# Altium PCB Main.PcbDoc
Units mm, origin at the board's own origin, x right, y up, seen from the top; angles counter-clockwise.
Board outline 60 x 30 mm, 2 copper layers (Top Layer, Bottom Layer); 37 components, 56 nets, 159 pads, 18 vias.
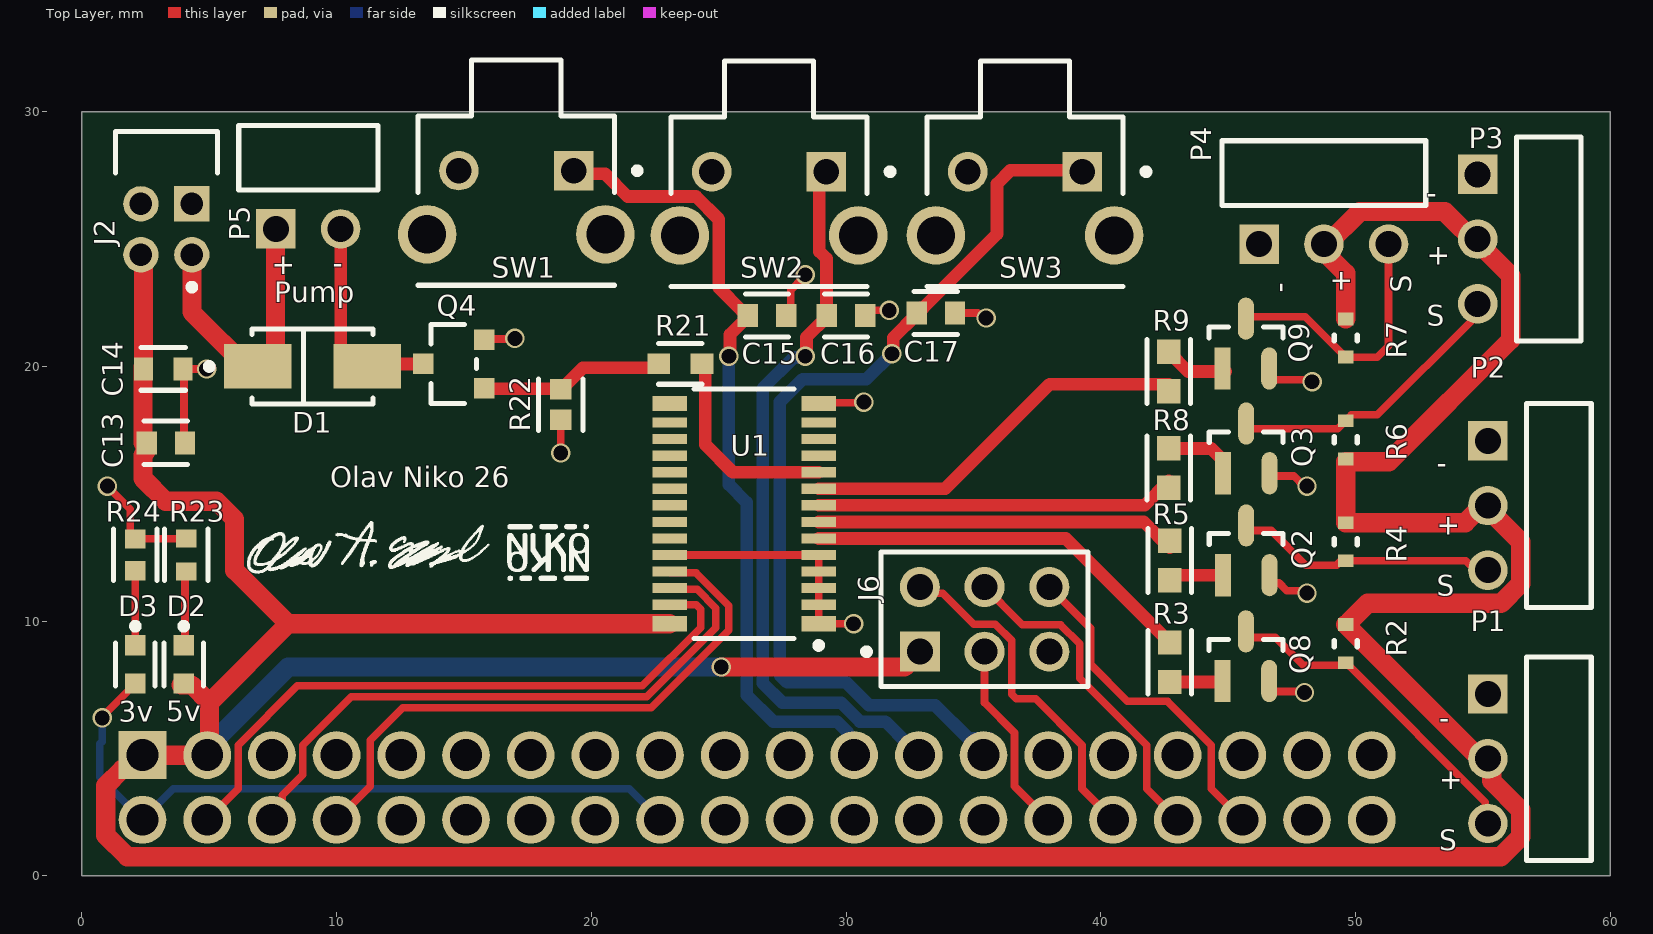
[diagram p0: Top Layer view]
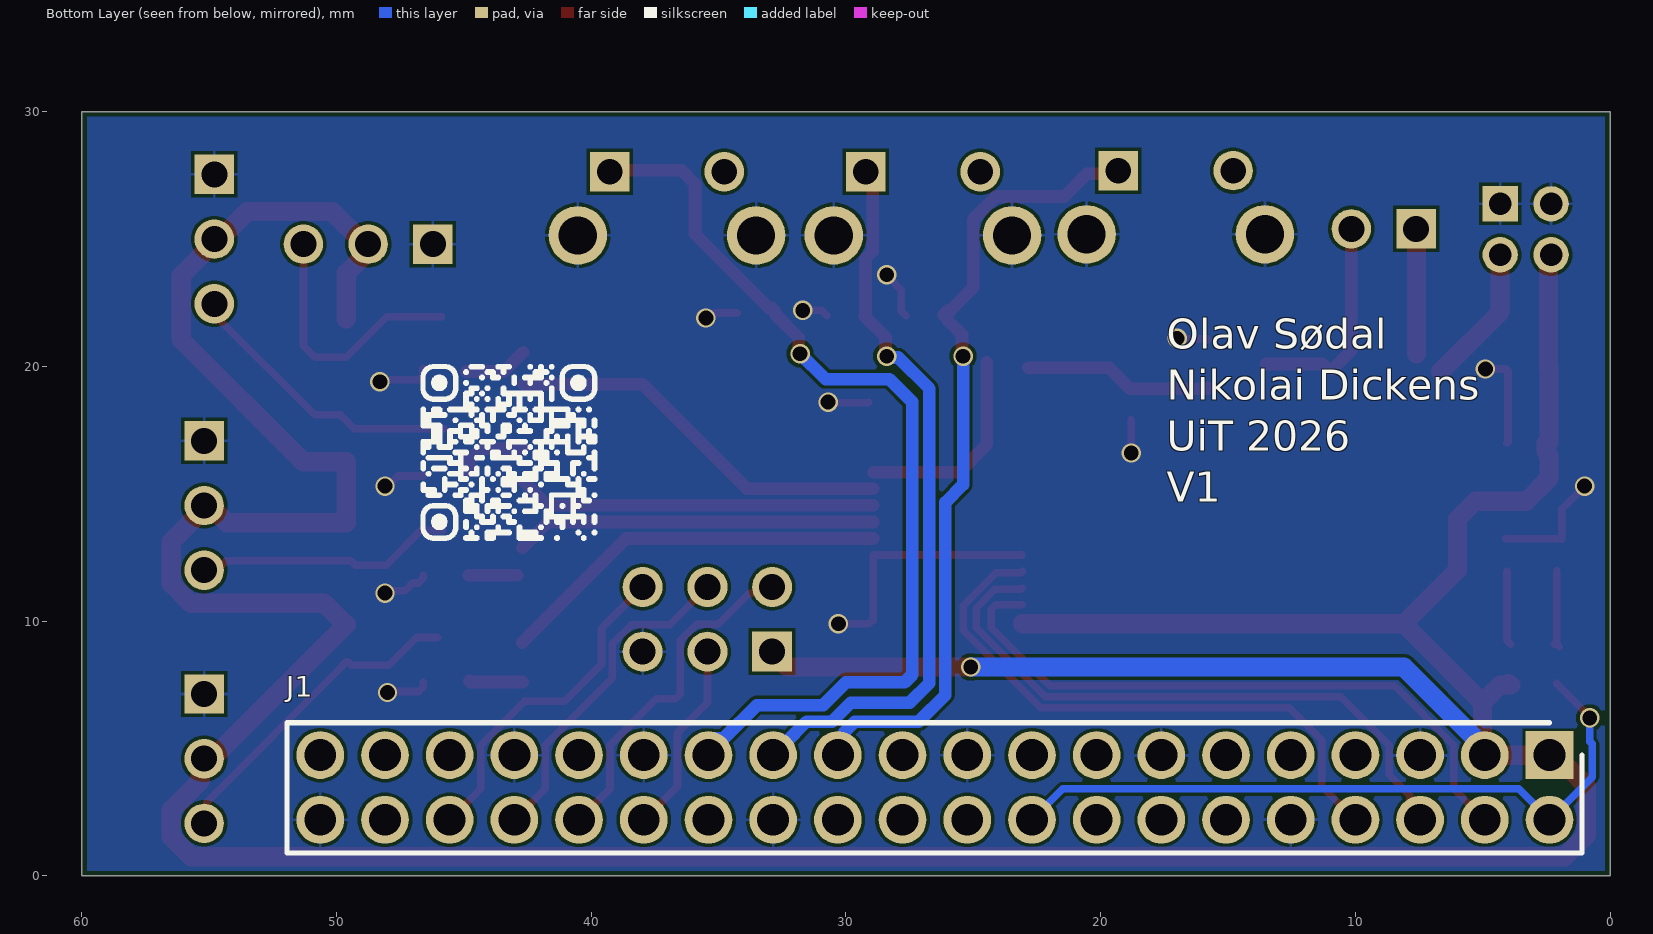
[diagram p1: Bottom Layer view, seen from below]
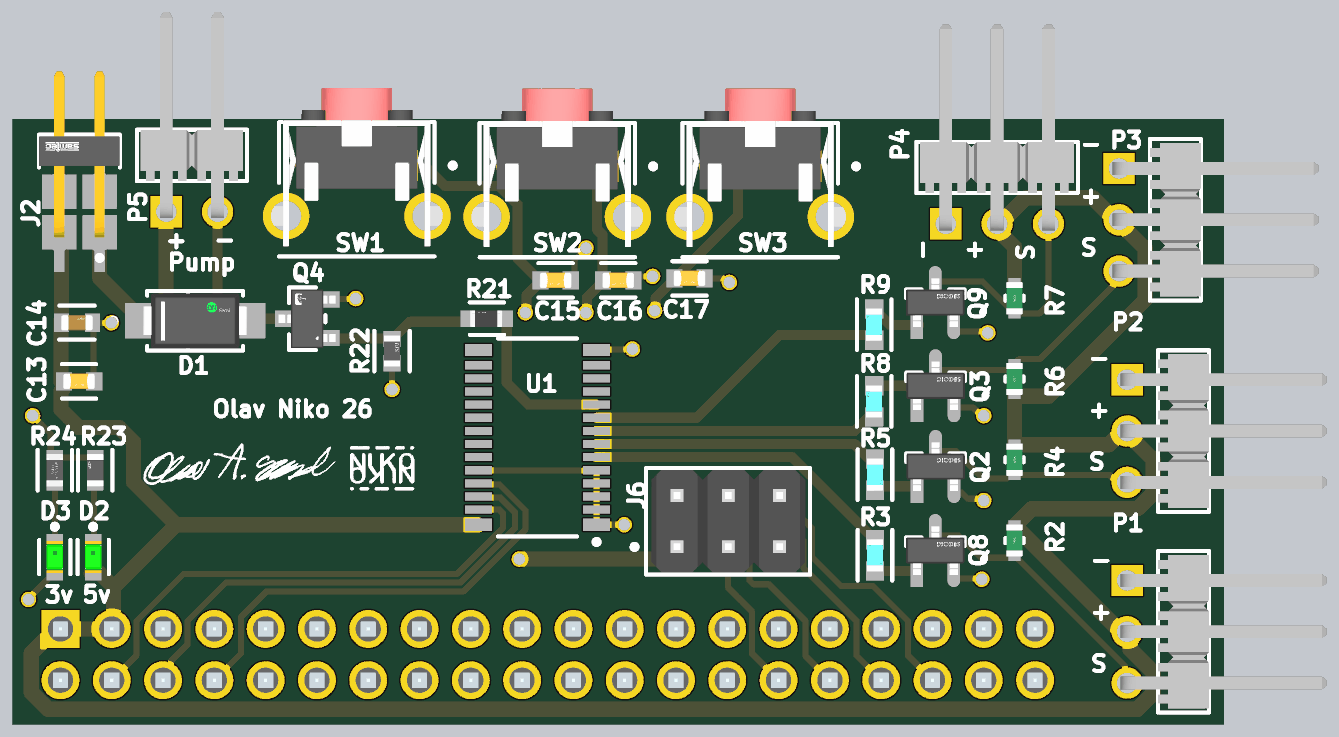
[diagram p2: 3D render of the assembled board from above, using the file's embedded part models]

## Layer stack, top to bottom
Top Solder: solder mask 0.0102, Solder Resist, Dk 3.5
Top Layer: signal copper 0.0356
Dielectric 1: dielectric 0.32, FR-4, Dk 4.8
Bottom Layer: signal copper 0.0356
Bottom Solder: solder mask 0.0102, Solder Resist, Dk 3.5

## Board outline
60,0 0,0 0,30 60,30

## Design rules (kind name [scope] priority, off if disabled: settings)
BoardOutlineClearance [All] p1: gap=0.2 ignorepadtopadclearanceinfootprint=FALSE
Clearance [All] p1: gap=0.127 ignorepadtopadclearanceinfootprint=FALSE except(0.25: Arc-Hole Track-Hole SMDPad-Hole THPad-Hole Via-Hole Fill-Hole Poly-Hole Region-Hole Text-Hole)
ComponentClearance [All] p1: gap=0.127 collisioncheckmode=3 verticalgap=0.127 showdistances=TRUE
DiffPairsRouting [All] p1: maxlimit=0.254 minlimit=0.127 mostfreqgap=0.127 toplayer_minwidth=0.127 toplayer_maxwidth=25.4 toplayer_prefwidth=0.127 bottomlayer_minwidth=0.127 bottomlayer_maxwidth=25.4 bottomlayer_prefwidth=0.127 maxuncoupledlength=12.7
Height [All] p1: minheight=0 maxheight=1816.048 prefheight=12.7
HoleSize [All] p1: absolutevalues=TRUE maxlimit=6.3 minlimit=0.3 maxpercent=80.000 minpercent=20.000
HoleToHoleClearance [All] p1: gap=0.25 allowstackedmicrovias=FALSE
MinimumAnnularRing [All] p1: minimumring=0.076
MinimumSolderMaskSliver [All] p1: minsoldermaskwidth=0
PlaneClearance [All] p1: clearance=0.127
PlaneConnect PlaneConnectPowerPads [InPadClass('PowerPads')] p1: planeconnectstyle=Direct reliefexpansion=0.508 reliefentries=4 reliefconductorwidth=0.254 reliefairgap=0.254
PlaneConnect [All] p2: pad.planeconnectstyle=Relief pad.reliefexpansion=0.3 pad.reliefentries=4 pad.reliefconductorwidth=0.127 pad.reliefairgap=0.127 via.planeconnectstyle=Direct via.reliefexpansion=0.3 via.reliefentries=4 via.reliefconductorwidth=0.127 via.reliefairgap=0.127
PolygonConnect PolygonConnectPowerPads [All vs (InPadClass('PowerPads'))] p1: connectstyle=Direct reliefconductorwidth=0.254 reliefentries=4 polygonreliefangle="90 Angle" airgapwidth=0.254
PolygonConnect [All] p2: thpad.connectstyle=Relief thpad.reliefconductorwidth=0.127 thpad.reliefentries=4 thpad.polygonreliefangle="90 Angle" thpad.airgapwidth=0.127 smdpad.connectstyle=Relief smdpad.reliefconductorwidth=0.127 smdpad.reliefentries=4 smdpad.polygonreliefangle="90 Angle" smdpad.airgapwidth=0.127 via.connectstyle=Direct via.reliefconductorwidth=0.127 via.reliefentries=4 via.polygonreliefangle="90 Angle" via.airgapwidth=0.127
RoutingVias [All] p1: holewidth=0.3 width=0.6 viastyle="Through Hole" minholewidth=0.3 minwidth=0.6 maxholewidth=0.6 maxwidth=6.6
SilkToSilkClearance [All] p1: silktosilkclearance=0
SilkToSolderMaskClearance [IsPad] p1: minsilkscreentomaskgap=0.127 clearancetoexposedcopper=TRUE
SolderMaskExpansion [All] p1: expansion=0.075 istentingtop=FALSE
SupplyNets "Schematic Supply Nets_4" [InNet('12V')] p1: voltage=0.000
SupplyNets "Schematic Supply Nets" [InNet('GND')] p2: voltage=0.000
SupplyNets "Schematic Supply Nets_1" [InNet('5V')] p3: voltage=0.000
SupplyNets "Schematic Supply Nets_3" [InNet('3V3')] p4: voltage=0.000
Width [All] p1: maxlimit=25.4 minlimit=0.127 preferedwidth=0.127 minimp=50.000000 maximp=50.000000 favimp=50.000000
20 further rules are at their usual default settings.

## Classes and differential pairs
component class Main: J2 J6
component class Designator: C13 C14 C15 C16 C17 D1 D2 D3 J1 P1 P2 P3 P4 P5 Q2 Q3 Q4 Q8 Q9 R2 R3 R4 R5 R6 R7 R8 R9 R21 R22 R23 R24 SW1 SW3 U1

## Components (designator, comment, footprint, x,y, rotation, side; value= is the part's Value field where it differs from the comment)
C13 "GRM188R61A106KE69D" FP-GRM18-0_15-MFG 3.2,19.9 r0 top value=10uF
C14 "100 nF" FP-CC0603-DA-MFG 3.3,17 r0 top
C15 "100 nF" FP-CC0603-DA-MFG 26.9,22 r0 top
C16 "100 nF" FP-CC0603-DA-MFG 30,22 r0 top
C17 "100 nF" FP-CC0603-DA-MFG 33.528,22.098 r0 top
D1 "SS14" FP-403AE-MFG 9.05,20 r180 top
D2 "LTST-C193KGKT-5A" FP-LTST-C193KGKT-5A-MFG 4,8.3 r270 top
D3 "LTST-C193KGKT-5A" FP-LTST-C193KGKT-5A-MFG 2.1,8.3 r270 top
J1 "803-87-040-10-001101" RHDR40W76P254_2X20_5080X508X700P 2.38,4.74 r0 bottom
J2 "TMM-102-01-G-D-RA" FP-TMM-102-01-G-D-RA-MFG 3.318,28.404 r180 top
J6 "M20-9980346" FP-M20-9980346-MFG 35.44,10.07 r0 top
P1 "MTSW-103-08-L-S-229-RA" SMTC-MTSW-103-08-X-S-229-RA 55.2,7.14 r270 top
P2 "MTSW-103-08-L-S-229-RA" SMTC-MTSW-103-08-X-S-229-RA 55.2,17.08 r270 top
P3 "MTSW-103-08-L-S-229-RA" SMTC-MTSW-103-08-X-S-229-RA 54.8,27.54 r270 top
P4 "MTSW-103-08-L-S-229-RA" SMTC-MTSW-103-08-X-S-229-RA 46.22,24.8 r0 top
P5 "TSW-102-22-G-S-RA" SMTC-TSW-102-22-X-S-RA 7.62,25.4 r0 top
Q2 "MMBT3904-7-F" FP-SOT23-IPC_A 45.712,12.783 r90 top
Q3 "MMBT3904-7-F" FP-SOT23-IPC_A 45.712,16.783 r90 top
Q4 "AO3400A" FP-SOT23-MFG 14.6,20.1 r180 top
Q8 "MMBT3904-7-F" FP-SOT23-IPC_A 45.7,8.623 r90 top
Q9 "MMBT3904-7-F" FP-SOT23-IPC_A 45.7,20.9 r90 top
R2 "SG73P1JTTD1002F" FP-SG73P1J-MFG 49.62,9.117 r90 top
R3 "RK73G1JTTD1001F" FP-RK73G1J-IPC_B 42.712,8.387 r270 top
R4 "SG73P1JTTD1002F" FP-SG73P1J-MFG 49.62,13.117 r90 top
R5 "RK73G1JTTD1001F" FP-RK73G1J-IPC_B 42.712,12.38 r270 top
R6 "SG73P1JTTD1002F" FP-SG73P1J-MFG 49.62,17.117 r270 top
R7 "SG73P1JTTD1002F" FP-SG73P1J-MFG 49.62,21.117 r90 top
R8 "RK73G1JTTD1001F" FP-RK73G1J-IPC_B 42.672,16.006 r90 top
R9 "RK73G1JTTD1001F" FP-RK73G1J-IPC_B 42.672,19.808 r90 top
R21 "RT0603FRE07100RL" FP-RT0603-MFG 23.5,20.1 r180 top value=100Ω
R22 "RMCF0603FG100K" FP-RMCF0603-IPC_C 18.8,18.5 r90 top
R23 "RC1608J222CS" FP-RC1608-IPC_C 4.1,12.6 r90 top
R24 "CRGCQ0603J3K3" FP-CRGCQ0603-IPC_C 2.1,12.6 r90 top value=3.3KΩ
SW1 "B3F-3122" FP-B3F-3122-MFG 17.054,27.611 r180 top
SW2 "B3F-3122" FP-B3F-3122-MFG 26.98,27.571 r180 top
SW3 "B3F-3122" FP-B3F-3122-MFG 37.028,27.571 r180 top
U1 "PCA9685PW/Q900,118" SOT361-1_V 26,14.222 r180 top

## Footprints (in the part's own frame and the unit in brackets; to place one, negate y for a bottom-side part, rotate by r counter-clockwise, add the part's x,y. Pads: shape width x height; smd on the part's side, far side on the other; paste and mask are expansions set on the pad)
FP-403AE-MFG [mm]
  rect 2.65x1.75 smd paste+0 mask+0: 1(-2.15,0) 2(2.15,0)
  silkscreen extent -2.37,-1.48 4.17,1.48, body extent -3.57,-1.58 3.57,1.58, height 0.25
FP-B3F-3122-MFG [mm]
  rect 1.55x1.55 hole 1 paste-2539.97 mask+0: 1(-2.25,-0.075)
  round 1.55 hole 1 paste-2539.97 mask+0: 2(2.25,-0.075)
  round 2.3 hole 1.5 paste-2539.97 mask+0: 3(-3.5,2.425) 4(3.5,2.425)
  silkscreen extent -4.88,-4.43 3.85,4.43, body extent -4.75,-4.52 4.75,4.52, height 0.25
FP-CC0603-DA-MFG [mm]
  rect 0.8x0.9 smd paste+0 mask+0: 1(-0.75,0) 2(0.75,0)
  silkscreen extent -0.85,-0.85 0.85,0.85, body extent -1.35,-0.75 1.35,0.75, height 0.25
FP-CRGCQ0603-IPC_C [mm]
  rect 0.758x0.812 smd paste+0 mask+0: 1(-0.627,0) 2(0.627,0)
  silkscreen extent -1.01,-0.85 1.01,0.85, body extent -1.11,-0.55 1.11,0.55, height 0.25
FP-GRM18-0_15-MFG [mm]
  rect 0.75x0.9 smd paste+0 mask+0: 1(-0.775,0) 2(0.775,0)
  silkscreen extent -0.88,-0.83 0.87,0.85, body extent -1.25,-0.58 1.25,0.58, height 0.25
FP-LTST-C193KGKT-5A-MFG [mm]
  rect 0.8x0.8 smd paste+0 mask+0: 1(-0.75,0) 2(0.75,0)
  silkscreen extent -1.62,-0.77 0.85,0.77, body extent -1.25,-0.55 1.25,0.55, height 0.25
FP-M20-9980346-MFG [mm]
  rect 1.57x1.57 hole 1.02 paste-2539.97 mask+0: 1(-2.54,-1.27)
  round 1.57 hole 1.02 paste-2539.97 mask+0: 2(-2.54,1.27) 3(0,-1.27) 4(0,1.27) 5(2.54,-1.27) 6(2.54,1.27)
  silkscreen extent -4.76,-2.64 4.06,2.64, body extent -3.8,-2.53 3.82,2.55, height 8.64
FP-RC1608-IPC_C [mm]
  rect 0.71x0.812 smd paste+0 mask+0: 1(-0.651,0) 2(0.651,0)
  silkscreen extent -1.01,-0.85 1.01,0.85, body extent -1.11,-0.55 1.11,0.55, height 0.25
FP-RK73G1J-IPC_B [mm]
  rect 0.956x0.912 smd paste+0 mask+0: 1(-0.775,0) 2(0.775,0)
  silkscreen extent -1.25,-0.86 1.25,0.86, body extent -1.5,-0.71 1.5,0.71, height 0.25
FP-RMCF0603-IPC_C [mm]
  rect 0.806x0.858 smd paste+0 mask+0: 1(-0.601,0) 2(0.601,0)
  silkscreen extent -1,-0.87 1,0.87, body extent -1.1,-0.58 1.1,0.58, height 0.25
FP-RT0603-MFG [mm]
  rect 0.9x0.8 smd paste+0 mask+0: 1(-0.85,0) 2(0.85,0)
  silkscreen extent -0.85,-0.81 0.86,0.8, body extent -1.4,-0.55 1.4,0.55, height 0.25
FP-SG73P1J-MFG [mm]
  rect 0.5x0.6 smd paste+0 mask+0: 1(-0.75,0) 2(0.75,0)
  silkscreen extent -0.13,-0.45 0.13,0.45, body extent -1.1,-0.55 1.1,0.55, height 0.25
FP-SOT23-IPC_A [mm]
  rect 1.659x0.627 smd paste+0 mask+0: 1(-0.977,0.915)
  rrect100% 1.659x0.627 smd paste+0 mask+0: 2(-0.977,-0.915) 3(0.977,0)
  silkscreen extent 0.23,-1.45 0.65,1.45, body extent -2.31,-1.95 2.31,1.95, height 0.25
FP-SOT23-MFG [mm]
  rect 0.8x0.8 smd paste+0 mask+0: 1(-1.2,0.95) 2(-1.2,-0.95) 3(1.2,0)
  silkscreen extent -0.9,-1.55 0.9,1.55, body extent -1.7,-1.78 1.7,1.78, height 0.25
FP-TMM-102-01-G-D-RA-MFG [mm]
  rect 1.39x1.39 hole 0.89 paste-2539.97 mask+0: 1(-1,2.02)
  round 1.39 hole 0.89 paste-2539.97 mask+0: 2(-1,4.02) 3(1,2.02) 4(1,4.02)
  silkscreen extent -2,-0.81 2,5.41, body extent -2.1,-4.24 2.1,6.09, height 0.25
RHDR40W76P254_2X20_5080X508X700P [mm]
  rect 1.875x1.875 hole 1.25: 1(0,0)
  round 1.875 hole 1.25: 2(0,2.54) 3(2.54,0) 4(2.54,2.54) 5(5.08,0) 6(5.08,2.54) 7(7.62,0) 8(7.62,2.54) 9(10.16,0) 10(10.16,2.54) 11(12.7,0) 12(12.7,2.54) 13(15.24,0) 14(15.24,2.54) 15(17.78,0) 16(17.78,2.54) 17(20.32,0) 18(20.32,2.54) 19(22.86,0) 20(22.86,2.54) 21(25.4,0) 22(25.4,2.54) 23(27.94,0) 24(27.94,2.54) 25(30.48,0) 26(30.48,2.54) 27(33.02,0) 28(33.02,2.54) 29(35.56,0) 30(35.56,2.54) 31(38.1,0) 32(38.1,2.54) 33(40.64,0) 34(40.64,2.54) 35(43.18,0) 36(43.18,2.54) 37(45.72,0) 38(45.72,2.54) 39(48.26,0) 40(48.26,2.54)
  silkscreen extent -1.27,-1.27 49.57,3.85, body extent -1.27,-1.27 49.53,3.81, height 7
SMTC-MTSW-103-08-X-S-229-RA [mm] "Assembly .025\" [.64] SQ Post Terminal Strip, 1x3 Pins, Right Angle, 2.54mm Pitch, Male"
  rect 1.55x1.55 hole 1.02: 1(0,0)
  round 1.55 hole 1.02: 2(2.54,0) 3(5.08,0)
  silkscreen extent -1.46,1.52 6.54,4.06, body extent -1.27,-0.32 6.35,9.88, height 3.05
SMTC-TSW-102-22-X-S-RA [mm] ".025 SQ Post Terminal Strip Assembly, 1x2 Pins, Right Angle, 2.54mm Pitch, Male"
  rect 1.55x1.55 hole 1.02: 1(0,0)
  round 1.55 hole 1.02: 2(2.54,0)
  silkscreen extent -1.46,1.52 4,4.06, body extent -1.27,-0.32 3.81,9.9, height 3.05
SOT361-1_V [mm] "SOP, 28-Leads, Body 9.7x4.4mm, Pitch 0.65mm, NXP Recommended"
  rect 1.35x0.6 smd: 1(-2.925,4.325) 14(-2.925,-4.325) 15(2.925,-4.325) 28(2.925,4.325)
  rect 1.35x0.4 smd: 2(-2.925,3.575) 3(-2.925,2.925) 4(-2.925,2.275) 5(-2.925,1.625) 6(-2.925,0.975) 7(-2.925,0.325) 8(-2.925,-0.325) 9(-2.925,-0.975) 10(-2.925,-1.625) 11(-2.925,-2.275) 12(-2.925,-2.925) 13(-2.925,-3.575) 16(2.925,-3.575) 17(2.925,-2.925) 18(2.925,-2.275) 19(2.925,-1.625) 20(2.925,-0.975) 21(2.925,-0.325) 22(2.925,0.325) 23(2.925,0.975) 24(2.925,1.625) 25(2.925,2.275) 26(2.925,2.925) 27(2.925,3.575)
  silkscreen extent -3.05,-4.9 1.96,5.3, body extent -2.2,-4.85 2.2,4.85, height 1.1

## Part data
C13: library part CMP-2000-05448-2, "CAP CER 10UF 10V X5R 0603", Capacitance=10uF, Manufacturer=Murata, Package=GRM18-0.15, Temperature="-55°C to +85°C", Temperature Characteristic=X5R, Temperature Coefficient=15%, Temperature Range High=+85°C, Temperature Range Low=-55°C, Tolerance=10%, Voltage Rating=10V, Automotive=No, Category=Cap, ComponentLink2Description=Datasheet, ComponentLink2URL=https://search.murata.co.jp/Ceramy/image/img/A01X/G101/ENG/GRM188R61A106KE69-01A.pdf, Device Class L1="Passive Components", Device Class L2=Capacitors, Device Class L3="Ceramic Capacitors", Digikey Description="CAP CER 10UF 10V X5R 0603", Height=0.95mm, Lead Free=Yes, Manufacturer Part Number=GRM188R61A106KE69D, Material=Ceramic, Mouser Description="Multilayer Ceramic Capacitors MLCC - SMD/SMT 0603 10uF 10volts X5R + - 10%", Octopart=https://octopart.com/grm188r61a106ke69d-murata-22851381, RoHS=TRUE
C14 C15 C16 C17: library part CMP-03422-000081-1, "CC0603 100 nF X7R 10.00% 25 V", Manufacturer=YAGEO, Manufacturer Part Number=CC0603KPX7R8BB104, Package=CC0603-DA, Temperature="-55°C to +125°C", Temperature Characteristic=X7R, Temperature Coefficient=15%, Temperature Range High=+125°C, Temperature Range Low=-55°C, Tolerance=0.1, Voltage="25 V", Automotive=No, Capacitance="100 nF", Category=Cap, ComponentLink2Description=Datasheet, ComponentLink2URL=http://www.yageo.com/documents/recent/UPY-GPHC_X7R_6.3V-to-50V_18.pdf, Device Class L1="Passive Components", Device Class L2=Capacitors, Device Class L3="Ceramic Capacitors", Footprint Url=http://www.yageo.com/exep/pages/download/literatures/UPY-C_GEN_24.pdf, Height=0.9mm, Lead Free=Yes, Material=Ceramic, Mouser Description="Multilayer Ceramic Capacitors MLCC - SMD/SMT 100nF 25V X7R 10%", Octopart=https://octopart.com/cc0603kpx7r8bb104-yageo-12885111, RoHS=TRUE, Voltage Rating="25 V"
D1: library part CMP-2000-04943-2, "DIODE SCHOTTKY 40V 1A SMA", Forward Current=1A, Manufacturer="ON Semiconductor", Max Junction Temp=+125°C, Max Repetitive Reverse Voltage=40V, Max Surge Forward Current=40A, Package=403AE, Peak Reverse Current=0.2mA, Temperature="-65°C to +125°C", Temperature Range Low=-65°C, Automotive=No, Category=Diode, ComponentLink2Description=Datasheet, ComponentLink2URL=https://www.onsemi.com/pub/Collateral/SS19-D.PDF, Device Class L1="Discrete Semiconductors", Device Class L2=Diodes, Device Class L3="Schottky Diodes", Digikey Description="DIODE SCHOTTKY 40V 1A SMA", Height=2.5mm, Lead Free=Yes, Manufacturer Part Number=SS14, Mouser Description="Schottky Diodes & Rectifiers SMA 40V 1.0A", Octopart=https://octopart.com/ss14-on+semiconductor-29205033, RoHS=TRUE, Standoff Height=0.05mm, Temperature Range High=+125°C
D2 D3: library part CMP-2000-06622-2, "LED GREEN CLEAR CHIP SMD", Case Code (Imperial)=0603, Case Code (Metric)=1608, Color=Green, Forward Current=30mA, Forward Voltage=2.3V, Lens Color=Colorless, Max Operating Temperature=85°C, Min Operating Temperature=-55°C, Package Quantity=3000, Power Dissipation=75mW, Reverse Voltage=5V, Test Current=5mA, Case/Package=0603, Depth=0.8mm, Dominant Wavelength=576.5nm, Height=0.35mm, Illumination Color=Green, Lead Free="Lead Free", Length=1.6mm, Lens Style=Diffused, Lens Transparency=Clear, Luminous Intensity=28mcd, Mount="Surface Mount", Number of Elements=1, Number of LEDs=1, Number of Pins=2, Packaging="Tape and Reel", Power Rating=75mW, Radiation Hardening=No, Viewing Angle=130°, Width=0.8mm
J1: "Connector", Manufacturer_Name=Preci-Dip, Mouser Part Number=437-8038704010001101, Arrow Part Number=803-87-040-10-001101, Arrow Price/Stock=https://www.arrow.com/en/products/803-87-040-10-001101/preci-dip-sa?utm_currency=USD&region=europe, Datasheet Link=https://componentsearchengine.com/Datasheets/1/803-87-040-10-001101.pdf, Height=7mm, Manufacturer_Part_Number=803-87-040-10-001101, Mouser Price/Stock=https://www.mouser.co.uk/ProductDetail/Preci-dip/803-87-040-10-001101?qs=q5BRkYolQ3gdlKuqU9%2F7IQ%3D%3D
J2: library part CMP-02766-001650-1, "2MM TERMINAL STRIP", Housing Color=Black, Max Current Rating=3.9A, Max Operating Temperature=125°C, Max Voltage Rating (AC)=500V, Min Operating Temperature=-55°C, Contact Material=Bronze, Contact Plating=Gold, Depth=7.97mm, Gender=Male, Housing Material=Polymer, Length=4mm, Number of Contacts=4, Number of Rows=2, Orientation="Right Angle", Packaging=Bulk, Pitch=2mm, Radiation Hardening=No, RoHS Compliant=Yes, Termination=Solder
J6: library part CMP-2000-06636-2, "CONN HEADER VERT 6POS 2.54MM", Current Rating=3A, Manufacturer=Harwin, Temperature="-40°C to +105°C", Temperature Range High=+105°C, Temperature Range Low=-40°C, Automotive=No, Category=Conn, ComponentLink2Description=Datasheet, ComponentLink2URL=https://cdn.harwin.com/pdfs/M20-998.pdf, Conn Gender=Male, Conn Orientation=Vertical, Contact Material=Tin,Nickel, Device Class L1=Connectors, Device Class L2="Headers and Wire Housings", Device Class L3=unset, Digikey Description="CONN HEADER VERT 6POS 2.54MM", Height=8.99mm, Lead Free=Yes, Manufacturer Part Number=M20-9980346, Mouser Description="2.54mm (0.1\") Pitch DIL Vertical PC Tail Pin Header, 6.1mm mating pin height, tin, 3+3 contacts", Number of Contacts=6, Number of Rows=2, Octopart=https://octopart.com/m20-9980346-harwin-5436545, Package=M20-9980346, Pitch=2.54mm, RoHS=TRUE
P1 P2 P3 P4: library part CMP-1024-00103-1, "Modified .025\" SQ Post Header, Through-hole, Right Angle, -55 to 125 degC, 2.54 mm Pitch, 3-Pin, Male, RoHS", Manufacturer=Samtec, Temperature Range="-55 to 125 degC", ComponentLink1Description="Manufacturer URL", ComponentLink1URL=http://www.samtec.com, ComponentLink2Description=Datasheet, ComponentLink2URL=http://www.samtec.com/documents/webfiles/pdf/MTSW.PDF, ComponentLink3Description="Package Specification", ComponentLink3URL=http://www.samtec.com/documents/webfiles/cpdf/MTSW-XXX-XX-X-X-XXXX-XX-XXX-MKT1.pdf, DatasheetVersion=F-214, Mounting Technology=Through-hole, Orientation="Right Angle", PackageDescription="Assembly .025\" [.64] SQ Post Terminal Strip", PackageReference=MTSW-103-08-X-S-229-RA, PackageVersion="BI, 2/1987", PartNumber=MTSW-103-08-L-S-229-RA, Pitch="2.54 mm", RoHS=True
P5: library part CMP-1024-00323-1, "0.025\" SQ Post Header, Through-hole, Right Angle, -55 to 125 degC, 2.54 mm Pitch, 2-Pin, Male, RoHS", Manufacturer=Samtec, Temperature Range="-55 to 125 degC", ComponentLink1Description="Manufacturer URL", ComponentLink1URL=http://www.samtec.com, ComponentLink2Description=Datasheet, ComponentLink2URL=http://www.samtec.com/documents/webfiles/pdf/TSW_TH.PDF, ComponentLink3Description="Package Specification", ComponentLink3URL=http://www.samtec.com/documents/webfiles/cpdf/TSW-XXX-XX-XXX-X-XX-XXX-MKT.pdf, DatasheetVersion=F-214, Mounting Technology=Through-hole, Orientation="Right Angle", PackageDescription=".025[0.64] SQ. Post Terminal Strip Assembly", PackageReference=TSW-102-22-X-S-RA, PackageVersion="DM, 8/1988", PartNumber=TSW-102-22-G-S-RA, Pitch="2.54 mm", RoHS=True
Q2 Q3 Q8 Q9: library part CMP-2000-04931-2, "TRANS NPN 40V 0.2A SMD SOT23-3", Case/Package=SOT-23, Collector Base Voltage (VCBO)=60V, Collector Emitter Breakdown Voltage=40V, Collector Emitter Saturation Voltage=300mV, Continuous Collector Current=200mA, Emitter Base Voltage (VEBO)=6V, Frequency=300MHz, Max Operating Temperature=150°C, Max Power Dissipation=300mW, Min Operating Temperature=-55°C, Package Quantity=3000, Power Dissipation=350mW, Collector Emitter Voltage (VCEO)=40V, Contact Plating=Tin, Element Configuration=Single, Gain Bandwidth Product=300MHz, Height=1mm, hFE Min=100, Lead Free="Lead Free", Length=3.05mm, Max Breakdown Voltage=40V, Max Collector Current=200mA, Max Frequency=300MHz, Mount="Surface Mount", Number of Elements=1, Number of Pins=3, Packaging="Tape and Reel", Polarity=NPN, Radiation Hardening=No, REACH SVHC="No SVHC", Transition Frequency=300MHz, Voltage Rating (DC)=40V, Weight=0.000282oz, Width=1.4mm
Q4: library part CMP-83955-000006-1, "MOSFET N-CH 30V 5.7A SOT23", Case/Package=SOT-23, Continuous Drain Current (ID)=5.7A, Drain to Source Voltage (Vdss)=30V, Gate to Source Voltage (Vgs)=12V, Input Capacitance=630pF, Max Operating Temperature=150°C, Max Power Dissipation=1.4W, Min Operating Temperature=-55°C, Lead Free="Lead Free", Mount="Surface Mount", Number of Elements=1, Number of Pins=3, Packaging="Tape and Reel", Power Dissipation=1.4W, Radiation Hardening=No, Rds On Max=26.5mR
R2 R4 R6 R7: library part CMP-00683-07748074-1, "SG73P1JTTD1002F Res Thick Film 0603 10K Ohm 1% 0.2W(1/5W) ±100ppm/C Pad SMD Automotive T/R", Case Code (Imperial)=0603, Case Code (Metric)=1608, Max Operating Temperature=155°C, Min Operating Temperature=-55°C, Power Rating=200mW, Resistance=10kΩ, Temperature Coefficient=100ppm/°C, Tolerance=1%, Voltage Rating=50V, Case/Package=0603, NexarPartId=7748074, Number of Pins=2, RoHS=Compliant, Termination=SMD/SMT, Voltage Rating (DC)=50V
R3 R5 R8 R9: library part CMP-04015-096822-1, "1kΩ ±1% 0.1W Chip Resistor 0603 Thick Film AEC-Q200 Qualified", Case Code (Imperial)=0603, Case Code (Metric)=1608, Max Operating Temperature=155°C, Min Operating Temperature=-55°C, Power Rating=100mW, Resistance=1kR, Resistor Type="Thick Film", Tolerance=1%, Case/Package=0603, Construction=Rectangular, Depth=0.8mm, Length=1.6mm, Military Standard=Not, Packaging="Tape and Reel", RoHS Compliant=Yes, Series=RK73G, Termination=SMD/SMT
R21: library part CMP-03412-022806-1, "RES SMD 100 OHM 1% 1/10W 0603", Manufacturer=Yageo, Package=RT0603, Power Rating=0.1W, Resistance=100Ω, Temperature="-55°C to +155°C", Temperature Coefficient="50 ppm/°C", Temperature Range High=+155°C, Temperature Range Low=-55°C, Tolerance=0.01, Voltage Rating=75V, Automotive=No, Category=Res, ComponentLink2Description=Datasheet, ComponentLink2URL=http://www.yageo.com/documents/recent/PYu-RT_1-to-0.01_RoHS_L_9.pdf, Composition="Thin Film", Device Class L1="Passive Components", Device Class L2=Resistors, Device Class L3="Chip SMD Resistors", Digikey Description="RES SMD 100 OHM 1% 1/10W 0603", Footprint Url=http://www.yageo.com/exep/pages/download/literatures/PYu-R_Mount_10.pdf, Height=0.55mm, Ipc Land Pattern Name=RESC16080X45, Lead Free=Yes, Manufacturer Part Number=RT0603FRE07100RL, Mouser Description="Thin Film Resistors - SMD 1/10W 100 ohm 1% 50ppm", Octopart=https://octopart.com/rt0603fre07100rl-yageo-39792638, RoHS=TRUE, Series=RT
R22: library part CMP-26527-003892-1, "100kΩ ±1% 0.1W 0603 Thick Film Chip Resistor AEC-Q200 compliant", Case Code (Imperial)=0603, Case Code (Metric)=1608, Max Operating Temperature=155°C, Max Power Dissipation=100mW, Min Operating Temperature=-55°C, Resistance=100kR, Resistor Type="Thick Film", Temperature Coefficient=100ppm/°C, Tolerance=1%, Case/Package=0603, Contact Plating=Tin, Features="Automotive AEC-Q200", Height=0.022inch, Lead Free="Lead Free", Length=0.061inch, Mount="Surface Mount", Number of Terminations=2, Packaging="Tape and Reel", Radiation Hardening=No, RoHS Compliant=Yes, Series=RMCF, Width=0.031inch
R23: library part CMP-13261-001595-1, "Res Thick Film 0603 2.2kΩ 5% 0.1W ±100ppm/°C Molded SMD T/R", Case Code (Imperial)=0603, Case Code (Metric)=1608, Max Operating Temperature=155°C, Max Power Dissipation=100mW, Min Operating Temperature=-55°C, Resistance=2.2kR, Temperature Coefficient=100ppm/°C, Tolerance=5%, Voltage Rating (DC)=50V, Case/Package=0603, Composition="Thick Film", Contact Plating=Tin, Depth=0.8mm, Features="Moisture Resistant", Height=0.022inch, Lead Free="Lead Free", Length=0.063inch, Military Standard=Not, Number of Terminations=2, Packaging="Tape and Reel", Power Rating=100mW, Radiation Hardening=No, Width=0.031inch
R24: library part CMP-03211-008656-1, "CRGCQ 0603 3K3 5%", Ambient Temperature Range High=+70°C, Manufacturer="TE Connectivity", Package=CRGCQ0603, Power Rating=0.1W, Resistance=3.3KΩ, Temperature="-55°C to +155°C", Temperature Coefficient=±100ppm/°C, Temperature Range High=+155°C, Temperature Range Low=-55°C, Tolerance=0.05, Voltage Rating=75V, Category=Res, ComponentLink2Description=Datasheet, ComponentLink2URL=https://www.te.com/commerce/DocumentDelivery/DDEController?Action=showdoc&DocId=Data+Sheet%7F1773204-3%7F1%7Fpdf%7FEnglish%7FENG_DS_1773204-3_1.pdf%7F4-2176339-809, Composition="Thick Film", Device Class L1="Passive Components", Device Class L2=Resistors, Device Class L3="Chip SMD Resistors", Digikey Description="CRGCQ 0603 3K3 5%", Height=0.55mm, Ipc Land Pattern Name=RESC16080X45, Lead Free=Yes, Manufacturer Part Number=CRGCQ0603J3K3, Octopart=https://octopart.com/crgcq0603j3k3-te+connectivity-91018121, RoHS=TRUE, Series=CRGCQ
SW1 SW2 SW3: library part CMP-08834-000053-1, "SWITCH TACTILE SPST-NO 0.05A 24V", Actuator Color=Grey, Contact Current Rating=50mA, Contact Resistance=100mR, Max Operating Temperature=70°C, Max Voltage Rating (DC)=24V, Min Operating Temperature=-25°C, Operating Force=1.47N, Package Quantity=1000, Ratings=IP00, Actuator Length=1.6mm, Actuator Type=Standard, Contact Material=Gold, Contact Plating=Gold, Current Rating=50mA, Depth=7.85mm, Electrical Life=300000Cycles, Height=7.4mm, Illumination Type=Non-Illuminated, Lead Free="Lead Free", Length=7.3mm, Max Current Rating=50mA, Mechanical Life=300000Cycles, Mount="Through Hole", Number of Poles=1, Orientation="Right Angle", Packaging=Bulk, Radiation Hardening=No, RoHS Compliant=Yes, Series=B3F, Switch Function=Off-Mom, Switch Travel=0.25mm, Termination="PC Pins", Throw Configuration=SPST, Voltage Rating (DC)=24V, Weight=0.25g, Width=6.25mm
U1: library part CMP-1595-00002-2, "16-Channel, 12-Bit PWM Fm+ I2C-Bus LED Controller, 2.3 to 5.5 V, -40 to 85 degC, 28-Pin TSSOP (SOT361-1), RoHS, Tape and Reel", Frequency="25000000 Hz", PartNumber=PCA9685, Supply Current Max="10 mA", Supply Voltage Max="5.5 V", Supply Voltage Min="2.3 V", Temperature Max="85 degC", Temperature Min="-40 degC", Code_JEDEC=MO-153, ComponentLink1Description="Manufacturer URL", ComponentLink1URL=http://www.nxp.com/, ComponentLink2Description=Datasheet, ComponentLink2URL=http://www.nxp.com/documents/data_sheet/PCA9685.pdf, ComponentLink3Description="Package Specification", ComponentLink3URL=http://www.nxp.com/documents/outline_drawing/sot361-1_po.pdf, DatasheetVersion="Rev. 4", Mounting Technology="Surface Mount", PackageDescription="28-Pin Small Outline Package, Body 9.7 x 4.4 mm, Pitch 0.65 mm", PackageVersion=02/2003, Packing="Tape and Reel", RoHS=TRUE

## Via types
v1: diameter 0.762, hole 0.584, Top Layer to Bottom Layer, 18 vias

## Nets (pads, with @x,y where several pads share a name; then routed paths per layer and width w, separated by ;. In a path a pad name is that pad's centre, name@x,y a point inside that pad or via, vN(x,y) a via of type N, cw(c..) or ccw(c..) an arc to the next point about the centre after c; other vN are vias at no path point)
3V3: D3.2 J1.2 J1.18 | length 28
  Top Layer w0.3: v1(0.8,6.2) 0.8,6.25 D3.2
  Bottom Layer w0.3: v1(0.8,6.2) 0.8,5.277 0.7,5.177 0.7,3.88 2.3,2.28 J1.2@2.3,2.2 ; J1.2 3.595,3.415 21.485,3.415 J1.18 J1.18@22.8,2.2
5V: C13.1 C14.1 D2.2 J1.1 J1.3 J2.4 J6.1 P1.2 P2.2 P3.2 P4.2 R2.2 R4.2 R6.2 R7.2 U1.28 | length 186.1
  Top Layer w0.75: C14.1@2.4,17 C13.1@2.4,20 ; C13.1 J2.4@2.425,24.375 ; C14.1@2.525,17 2.525,16.655 2.4,16.53 2.4,15.6 3.293,14.707 5.293,14.707 6,14 6,12 8.103,9.897 ; D2.2@3.9,7.5 4.311,7.5 5.009,6.803 ; D2.2 D2.2@4.025,7.525 ; J1.3@4.8,5 5.009,5.209 5.009,6.803 ; U1.28 8.103,9.897 ; v1(25.1,8.2) 32.3,8.2 J6.1 ; 5.009,6.803 8.103,9.897
  Top Layer w0.762: J1.1@1.583,4.183 0.935,3.535 0.935,1.601 1.781,0.755 55.709,0.755 56.483,1.529 56.483,2.591 55.351,3.724 55.351,4.236 55.187,4.4 55.087,4.4 R2.2 ; J1.1@1.823,4.183 J1.1 ; J1.1@2.876,4.74 J1.3 ; P4.2@48.7,24.8 48.7,24.576 49.62,23.656 R7.2 ; P4.2 48.893,24.8 50.176,26.083 53.501,26.083 54.19,25.394 54.193,25.394 54.587,25 P3.2 54.8,24.867 56.1,23.567 56.1,21.048 51.318,16.266 49.62,16.266 R4.2@49.62,13.968 ; R4.2 54.31,13.867 54.984,14.54 P2.2 55.2,14.407 56.483,13.124 56.483,11.469 55.714,10.7 50.478,10.7 R2.2@49.746,9.968
  Bottom Layer w0.75: J1.3@4.8,4.9 8.1,8.2 v1(25.1,8.2)
12V: D1.2 J2.2 P5.1 | length 10.5
  Top Layer w0.75: J2.2 4.318,22.132 D1.2@6.65,19.8 ; D1.2@7.6,20.5 P5.1@7.6,25.5
CLK: J1.8 U1.25 | length 23.4
  Top Layer w0.3: J1.8 11.325,3.525 11.325,5.329 12.6,6.604 ; 12.623,6.604 22.356,6.604 25.4,9.648 25.4,10.606 24.109,11.897 23.125,11.897 U1.25
GND: C13.2 C14.2 C15.2 C16.2 C17.2 J1.5 J1.10 J1.13 J1.19 J1.26 J1.29 J1.33 J1.40 J2.1 J2.3 J6.5 P1.1 P2.1 P3.1 P4.1 Q2.2 Q3.2 Q4.2 Q8.2 Q9.2 R22.1 R23.2 R24.2 SW1.3 SW1.4 SW2.3 SW2.4 SW3.3 SW3.4 U1.1 U1.2 U1.3 U1.4 U1.5 U1.14 U1.24 | length 36.2
  Top Layer w0.3: v1(1,15.3) 1.9,14.4 R24.2@1.9,13.227 ; R24.2@2.092,13.219 2.112,13.239 4.088,13.239 R23.2 ; J2.3@2.19,26.512 J2.3 ; C14.2 4.013,17.037 4.013,19.813 4.1,19.9 v1@4.8,19.9 ; J2.1 J2.1@4.402,26.3 ; SW1.4@13.47,25.186 SW1.4 ; Q4.2 15.825,21.075 17.075,21.075 v1@17.1,21.1 ; v1(18.8,16.6) R22.1 ; SW1.3@20.577,24.777 SW1.3@20.7,24.9 ; U1.24@23.1,12.6 23.103,12.597 U1.5 U1.4 U1.3 U1.2 U1.1@28.925,10.025 ; SW2.4@23.288,24.588 SW2.4@23.4,24.7 ; C15.2 27.825,22.175 27.825,23 28.3,23.475 v1@28.3,23.5 ; U1.1@29,10 29.102,9.898 30.298,9.898 v1(30.3,9.9) ; U1.14@29.1,18.6 29.127,18.574 30.673,18.574 v1(30.7,18.6) ; SW2.3@30.48,24.745 SW2.3 ; C16.2 30.95,22.2 31.5,22.2 v1@31.7,22.4 ; SW3.4@33.528,24.753 SW3.4 ; C17.2 35.177,22.098 35.375,21.9 v1@35.4,21.9 ; SW3.3@40.8,25.3 SW3.3@41.212,24.888 ; Q8.2@46.6,7.6 46.6,7.406 46.766,7.24 47.96,7.24 v1(48,7.2) ; Q2.2@46.6,11.8 46.6,11.678 46.778,11.5 47,11.5 47.312,11.188 48.012,11.188 v1(48.1,11.1) ; Q3.2@46.6,15.7 47.575,15.7 47.975,15.3 v1(48.1,15.3) ; Q9.2 46.615,19.63 46.766,19.479 48.121,19.479 v1@48.3,19.3 ; P1.1@54.96,6.7 P1.1@55.2,6.94 ; P2.1@55.02,16.9 P2.1
  other v1: 48.3,19.4 4.9,19.9 17,21.1 35.5,21.9 31.7,22.2 28.4,23.6
"Green (S+)_1": 
"Green (S+)_2": 
"Green (S+)_3": 
HX711_1: J1.32 J6.2 | length 13.6
  Top Layer w0.3: J6.2 33.143,11.097 33.803,11.097 35.019,9.881 35.861,9.881 36.502,9.24 36.502,7.13 36.678,6.954 37.443,6.954 39.265,5.132 39.265,3.415 J1.32
HX711_2: J1.34 J6.4 | length 13.4
  Top Layer w0.3: J6.4@35.3,11.48 36.918,9.862 38.42,9.862 39.173,9.109 39.173,7.765 41.805,5.132 41.805,3.415 J1.34
HX711_3: J1.36 J6.6 | length 13.2
  Top Layer w0.3: J6.6 39.6,9.72 39.6,8.3 41.043,6.857 42.621,6.857 44.345,5.132 44.345,3.415 J1.36
Knapp_1: C15.1 J1.23 SW1.1 | length 31.8
  Top Layer w0.5: SW1.1 19.426,27.564 20.536,27.564 21.427,26.673 24.113,26.673 25.007,25.779 25.007,23.093 25.9,22.2 26,22.2 C15.1@26.159,22.041 ; v1(25.4,20.4) 25.45,20.45 25.45,21.25 26,21.8 26,21.85 C15.1
  Bottom Layer w0.5: v1(25.4,20.4) 25.4,15.365 26.1,14.665 ; 26.1,14.6 26.1,7.1 27.145,6.055 29.645,6.055 30.057,5.643 30.057,5.003 J1.23
Knapp_2: C16.1 J1.25 SW2.1 | length 28.7
  Top Layer w0.5: v1(28.4,20.4) 28.45,20.45 28.45,21.15 29.25,21.95 C16.1 ; C16.1@29.23,22.078 29.23,24.236 28.953,24.513 28.953,27.369 SW2.1
  Bottom Layer w0.5: v1(28.4,20.4) 28.35,20.35 27.95,20.35 26.727,19.127 26.727,7.573 27.5,6.8 29.8,6.8 30.545,6.055 31.545,6.055 32.411,5.189 32.811,5.189 J1.25@32.9,5.1
Knapp_3: C17.1 J1.27 SW3.1 | length 37
  Top Layer w0.5: v1(31.8,20.5) 31.85,20.55 31.85,21.12 32.778,22.048 C17.1 ; C17.1@32.803,22.173 32.928,22.298 33.028,22.298 35.93,25.2 35.93,27.169 36.461,27.7 SW3.1@39.2,27.7
  Bottom Layer w0.5: v1(31.8,20.5) 30.8,19.5 28.3,19.5 27.4,18.6 27.4,7.893 27.693,7.6 30,7.6 30.9,6.7 33.5,6.7 34.8,5.4 J1.27@35.6,5.4
NetC3_2: 
NetC4_1: 
NetC4_2: 
NetC9_2: 
NetC10_1: 
NetC10_2: 
NetC11_2: 
NetC12_1: 
NetC12_2: 
NetD2_1: D2.1 R23.1 | length 2.9
  Top Layer w0.3: D2.1@3.9,9.1 4.05,9.25 R23.1@4.05,11.949
NetD3_1: D3.1 R24.1 | length 3.2
  Top Layer w0.3: D3.1@2,9 2.1,9.1 R24.1 ; D3.1@2.1,9.2 D3.1@2.2,9.1
NetHC711_3_2: 
NetHC711_3_4: 
NetHX711_1_2: 
NetHX711_1_4: 
NetHX711_2_2: 
NetHX711_2_4: 
NetJ6_3: 
NetP1_3: P1.3 Q8.3 R2.1 | length 12.9
  Top Layer w0.3: 46.036,9.359 46.858,9.359 47.952,8.266 49.414,8.266 R2.1@49.53,8.382 ; R2.1@49.6,8.4 49.637,8.4 49.77,8.267 49.77,8.23 55.104,2.896 55.104,1.956 P1.3@55.2,1.86
NetP2_3: P2.3 Q2.3 R4.1 | length 10.1
  Top Layer w0.3: Q2.3@45.837,13.558 46.697,13.558 48.055,12.2 49.257,12.2 49.424,12.367 54.335,12.367 54.549,12.153 55.047,12.153 P2.3
NetP3_3: P3.3 Q3.3 R6.1 | length 11.3
  Top Layer w0.3: Q3.3@45.774,17.558 49.308,17.558 49.847,18.097 50.863,18.097 54.647,21.881 54.647,22.307 P3.3
NetP4_3: P4.3 Q9.3 R7.1 | length 10.1
  Top Layer w0.3: Q9.3@45.883,21.952 48.034,21.952 R7.1 50.861,20.367 51.3,20.806 51.3,24.63 P4.3@51.308,24.638
NetQ2_1: Q2.1 R5.2 | length 1.9
  Top Layer w0.5: R5.2@42.906,11.806 Q2.1
NetQ3_1: Q3.1 R8.2 | length 2.7
  Top Layer w0.5: R8.2 44.338,16.782 44.8,16.319 Q3.1@44.8,15.9
NetQ4_1: Q4.1 R21.2 R22.2 | length 7.4
  Top Layer w0.5: Q4.1 15.825,19.125 18.85,19.125 19.675,19.95 R21.2@22.85,19.95
NetQ8_1: Q8.1 R3.2 | length 2.1
  Top Layer w0.5: R3.2@42.7,7.6 R3.2 44.75,7.611 Q8.1
NetQ9_1: Q9.1 R9.2 | length 2.5
  Top Layer w0.5: R9.2@42.672,20.561 43.433,19.8 Q9.1@44.9,19.8
PD_SCK: J1.30 J6.3 | length 7.8
  Top Layer w0.3: J6.3@35.8,8.8 35.44,8.44 35.44,6.791 36.615,5.617 36.615,3.525 J1.30
"Pump -": D1.1 P5.2 Q4.3 | length 8.2
  Top Layer w0.5: P5.2 10.16,20.625 10.885,19.9 D1.1@10.9,19.9 ; D1.1 11.3,20.1 Q4.3@13.5,20.1
PWM_0: R3.1 U1.6 | length 15.5
  Top Layer w0.5: U1.6 38.627,13.247 R3.1
PWM_1: R5.1 U1.7 | length 14.2
  Top Layer w0.5: U1.7 41.695,13.897 42.708,12.883 R5.1@42.712,12.883
PWM_2: R8.1 U1.8 | length 14.1
  Top Layer w0.5: U1.8 41.716,14.547 R8.1@42.672,15.503
PWM_3: R9.1 U1.9 | length 15.4
  Top Layer w0.5: U1.9 33.889,15.197 37.996,19.304 R9.1@42.672,19.304
PWM_4: R21.1 U1.10 | length 8.1
  Top Layer w0.5: R21.1@24.477,20.16 24.477,16.923 25.553,15.847 U1.10
"RED (E+)_1": 
"RED (E+)_2": 
"RED (E+)_3": 
SCL: J1.6 U1.26 | length 24
  Top Layer w0.3: J1.6@7.4,2.7 7.534,2.7 7.861,3.027 7.861,3.161 8.675,3.975 8.675,5.132 10.573,7.031 11,7.031 ; 11.05,7.031 22.18,7.031 24.892,9.743 24.892,10.51 24.155,11.247 23.125,11.247 U1.26
SDA: J1.4 U1.27 | length 25.5
  Top Layer w0.3: J1.4 6.135,3.415 6.135,5.132 8.46,7.458 22.003,7.458 24.293,9.748 24.293,10.313 24.292,10.471 24.116,10.647 U1.27
"White (S-)_1": 
"White (S-)_2": 
"White (S-)_3": 
pads on no net: J1.7 J1.9 J1.11 J1.12 J1.14 J1.15 J1.16 J1.17 J1.20 J1.21 J1.22 J1.24 J1.28 J1.31 J1.35 J1.37 J1.38 J1.39 SW1.2 SW2.2 SW3.2 U1.11 U1.12 U1.13 U1.15 U1.16 U1.17 U1.18 U1.19 U1.20 U1.21 U1.22 U1.23

## Polygon pours and split planes (outlines as drawn)
GND on Bottom Layer "GND_L02_P000" (solid, pour order 0): 0,0 0,30 60,30 60,0

## Silkscreen, mask and mechanical layers (free items; w line width, h text height)
Top Overlay:
  drawing of 15 lines, arcs and shapes, not listed
  text "-" at 9.854,23.654 h0.8
  text "+" at 7.454,23.621 h0.8
  text "- /  / + /  / S" at 52.2,22.9 h0.8 r90
  text "Pump" at 7.554,22.521 h0.8
  text "- /  / + /  / S" at 52.8,21.6 h0.8
  text "Olav Niko 26" at 9.754,15.254 h0.8
  text "- /  / + /  / S" at 53.2,11 h0.8
  text "5v" at 3.32,6.07 h0.8
  text "3v" at 1.454,6.054 h0.8
  text "- /  / + /  / S" at 53.3,1 h0.8
Bottom Overlay:
  drawing of 80 lines, arcs and shapes, not listed
  text "Olav Sødal / Nikolai Dickens / UiT 2026 / V1" at 17.4,14.3 h2